# Altium PCB Drimp_Quadcopter.PcbDoc
Units mm, origin at the board's own origin, x right, y up, seen from the top; angles counter-clockwise.
Board outline 98.2 x 98.2 mm, 4 copper layers (Top Layer, Internal Plane 1, Internal Plane 2, Bottom Layer); 73 components, 52 nets, 297 pads, 99 vias.
Unrouted connection lines stored in the file: 1.
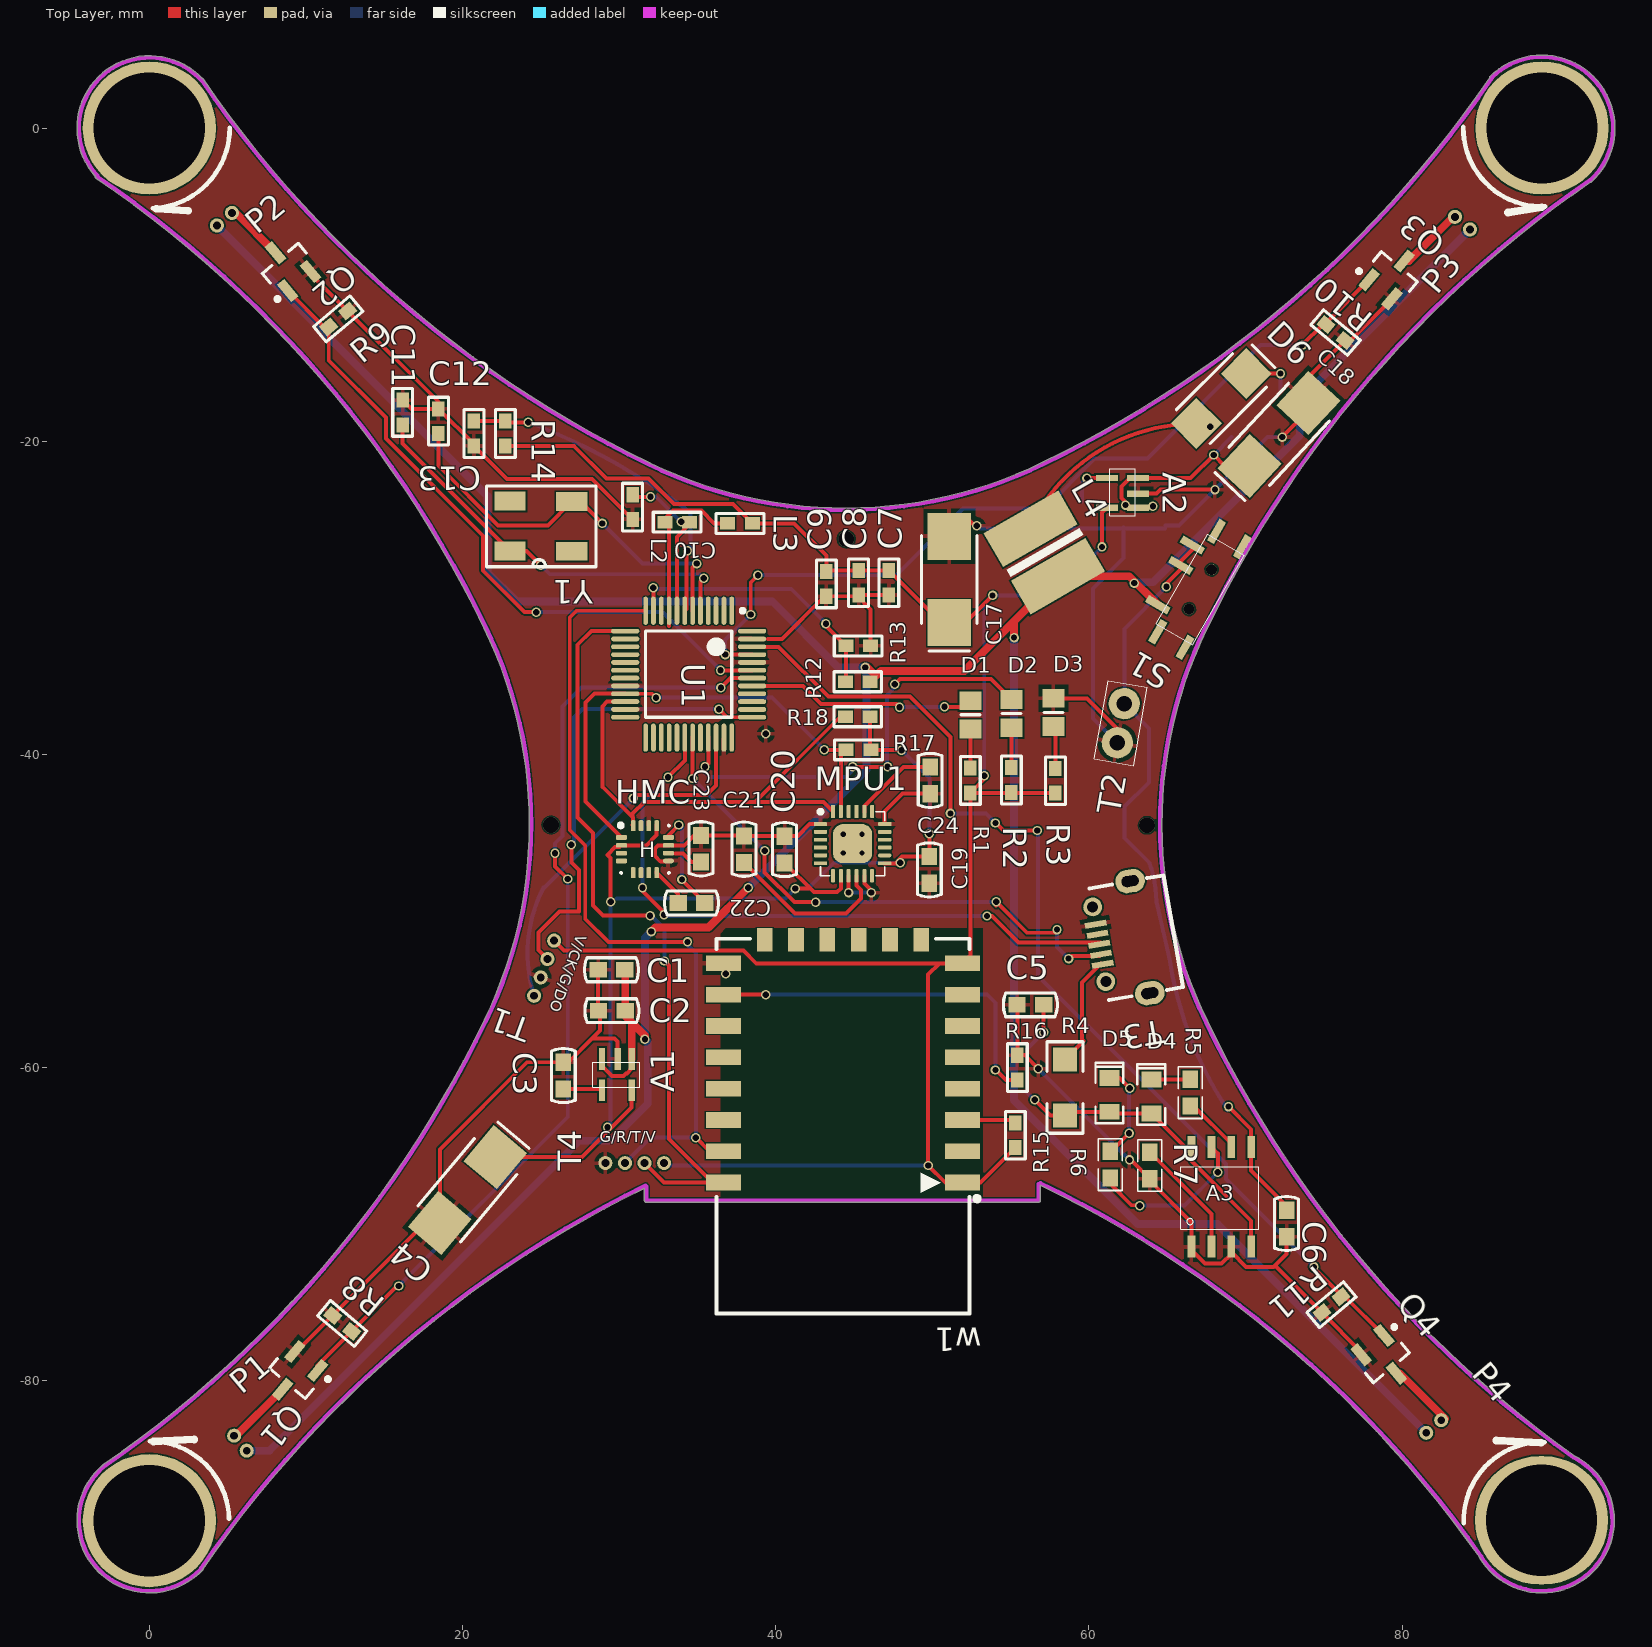
[diagram p0: Top Layer view]
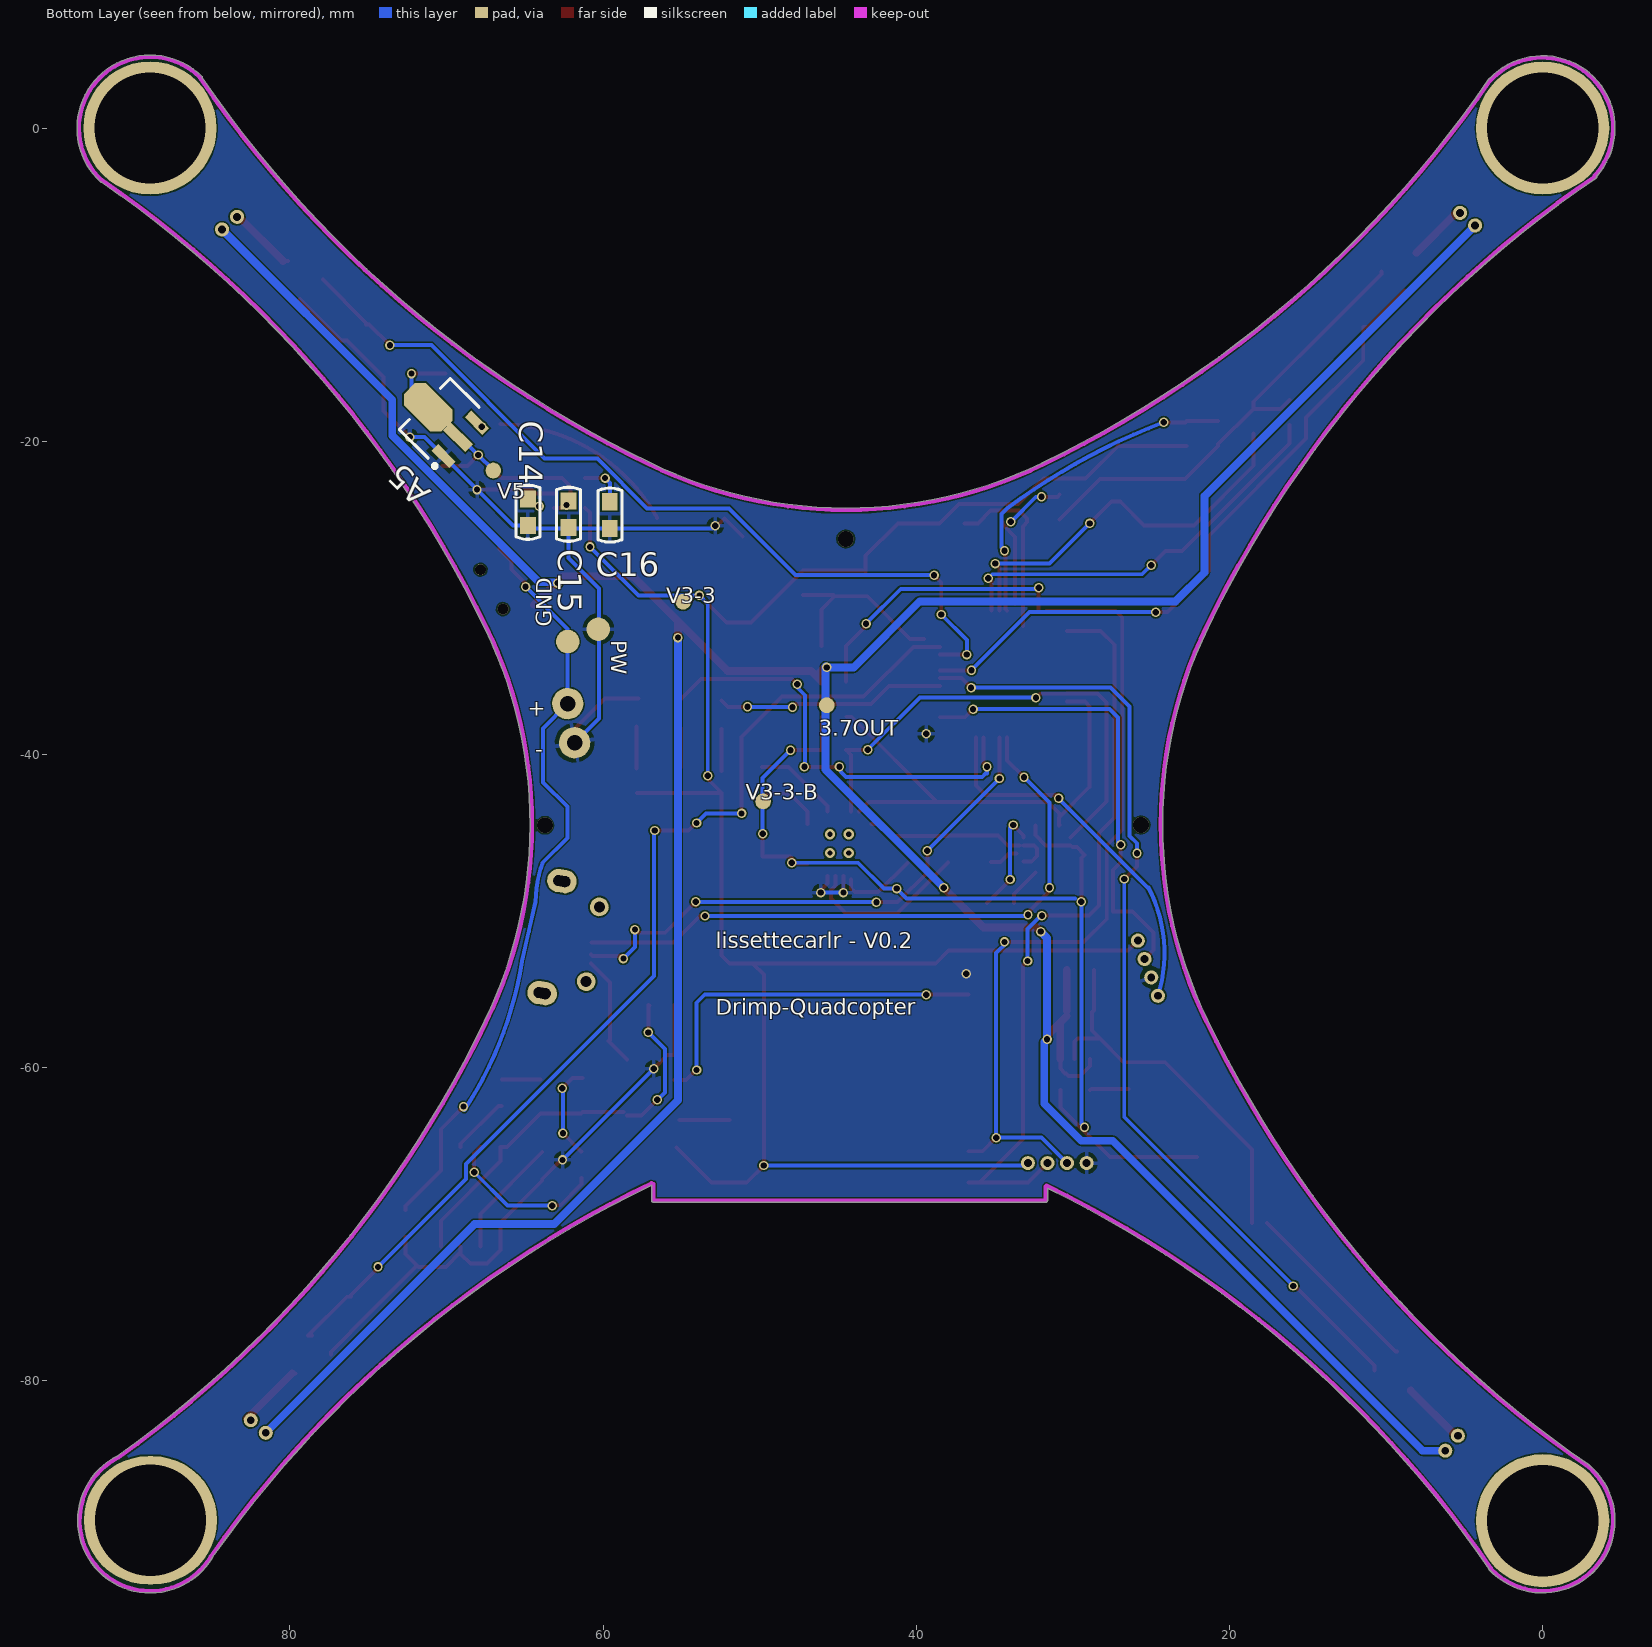
[diagram p1: Bottom Layer view, seen from below]
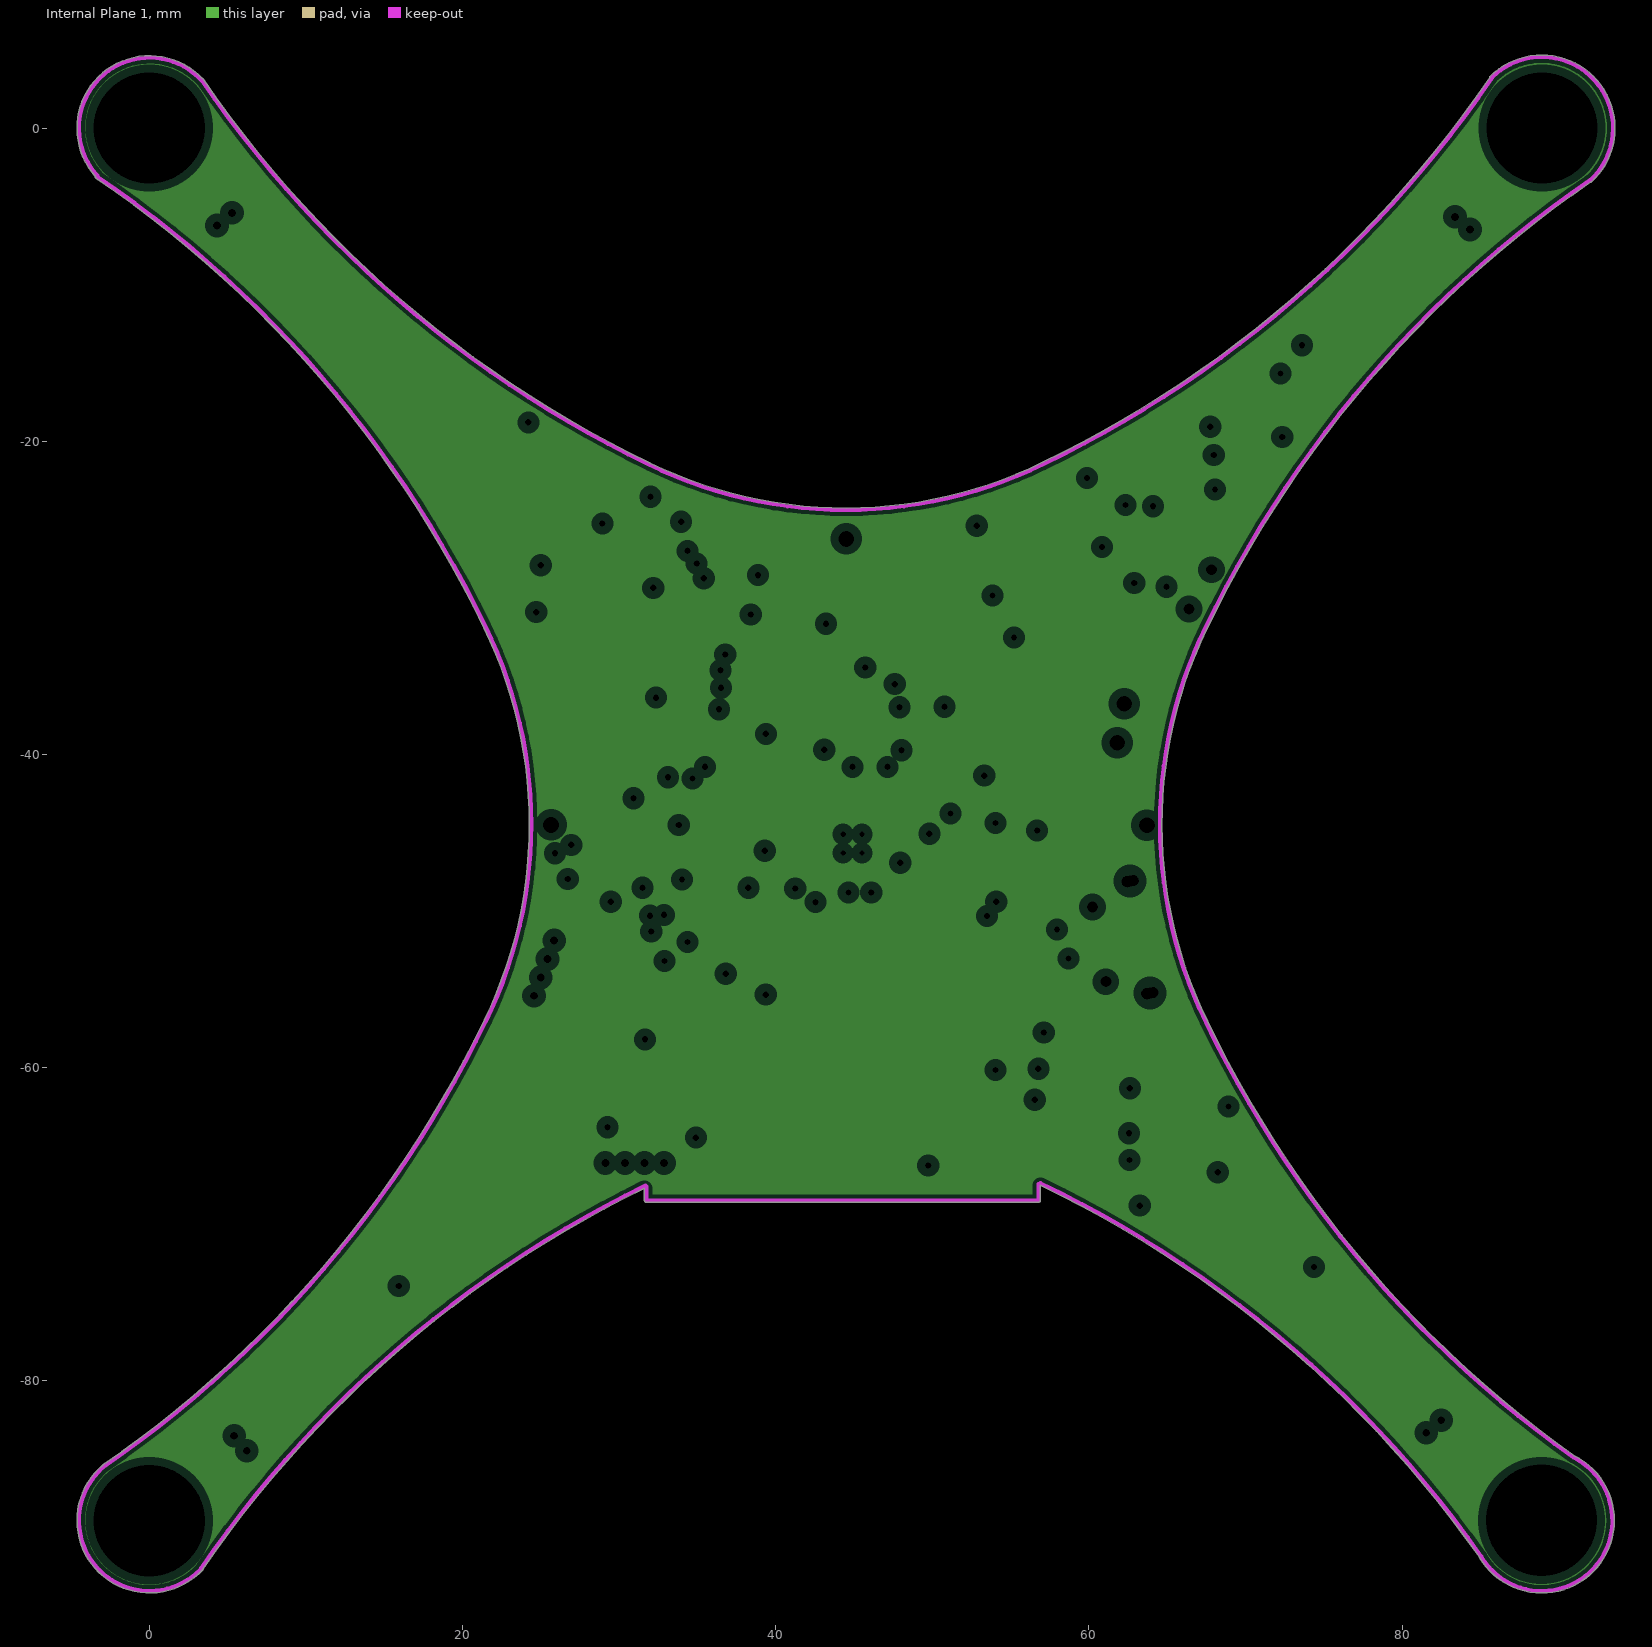
[diagram p2: Internal Plane 1, clearances drawn from the general rule]
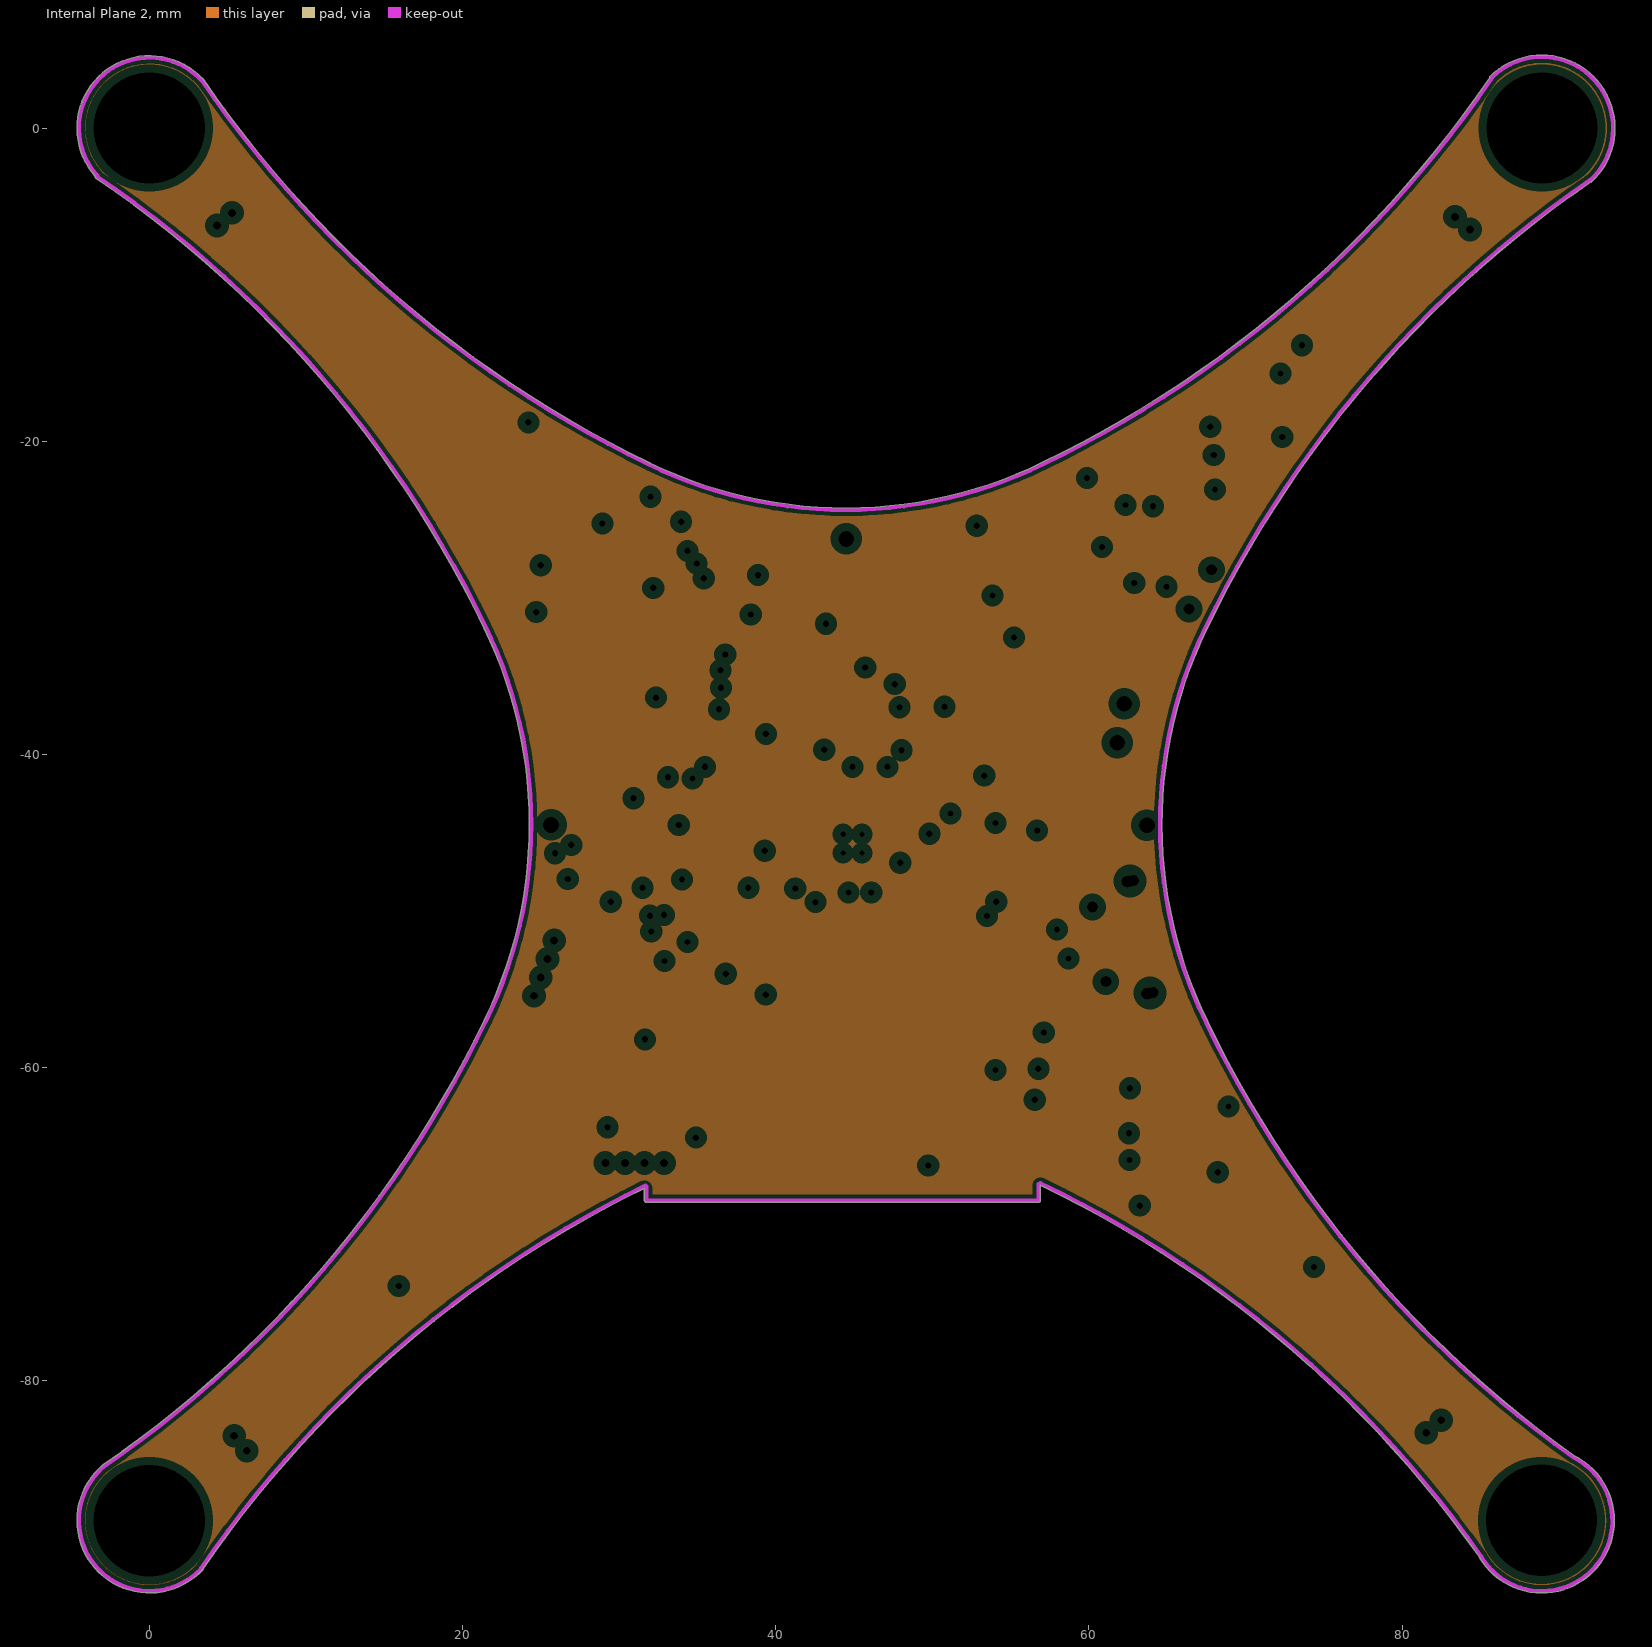
[diagram p3: Internal Plane 2, clearances drawn from the general rule]

## Layer stack, top to bottom
Top Solder: solder mask 0.0102, Solder Resist, Dk 3.5
Top Layer: signal copper 0.0356
Dielectric 1: dielectric 0.32, FR-4, Dk 4.8
Internal Plane 1: plane copper 0.0356
Dielectric2: dielectric 0.32, FR-4, Dk 4.8
Internal Plane 2: plane copper 0.0356
Dielectric3: dielectric 0.32, FR-4, Dk 4.8
Bottom Layer: signal copper 0.0356
Bottom Solder: solder mask 0.0102, Solder Resist, Dk 3.5

## Board outline
-2.974,-85.378 ccw(c0.016,-88.912) 3.416,-92.051 ccw(c3.323,-91.964) 3.45,-91.976 cw(c63.675,-133.386) 31.615,-67.704 31.615,-68.466 ccw(c31.742,-68.466) 31.742,-68.593 56.774,-68.593 ccw(c56.774,-68.466) 56.901,-68.466 56.901,-67.509 cw(c25.193,-133.362) 84.931,-91.25 ccw(c85.056,-91.227) 84.947,-91.293 ccw(c88.916,-88.912) 93.544,-88.912 ccw(c88.916,-88.912) 90.985,-84.772 ccw(c90.928,-84.886) 90.958,-84.762 cw(c133.39,-25.252) 67.576,-57.04 ccw(c67.461,-57.095) 67.576,-57.039 cw(c93.234,-44.462) 67.531,-31.977 ccw(c67.437,-31.891) 67.551,-31.946 cw(c133.366,-63.734) 92,-3.478 ccw(c91.997,-3.35) 92.084,-3.444 ccw(c88.916,-0.012) 93.587,-0.012 ccw(c88.916,-0.012) 85.613,3.291 ccw(c85.703,3.201) 85.576,3.19 cw(c25.256,44.463) 57.044,-21.351 ccw(c57.099,-21.466) 57.043,-21.351 cw(c44.466,4.306) 31.981,-21.396 ccw(c31.895,-21.49) 31.95,-21.376 cw(c63.738,44.438) 3.445,3.125 ccw(c3.34,3.053) 3.37,3.177 ccw(c0.016,-0.012) -3.445,-3.084 ccw(c-3.32,-3.106) -3.392,-3.211 cw(c-44.459,-63.671) 21.355,-31.883 ccw(c21.47,-31.828) 21.355,-31.884 cw(c-4.302,-44.462) 24.272,-44.462 cw(c-4.302,-44.462) 21.4,-56.946 ccw(c21.494,-57.032) 21.38,-56.977 cw(c-44.434,-25.189) -2.942,-85.359 ccw(c-2.892,-85.476)

## Design rules (kind name [scope] priority, off if disabled: settings)
Clearance [All] p1: gap=0.1
PlaneClearance [All] p1: clearance=0.508
PlaneConnect [All] p1: planeconnectstyle=Relief reliefexpansion=0.508 reliefentries=4 reliefconductorwidth=0.254 reliefairgap=0.254
PolygonConnect [All] p1: connectstyle=Relief reliefconductorwidth=0.254 reliefentries=4 polygonreliefangle="90 Angle" airgapwidth=0.254
RoutingVias [All] p1: holewidth=0.711 width=1.27 viastyle="Through Hole" minholewidth=0.711 minwidth=1.27 maxholewidth=0.711 maxwidth=1.27
SolderMaskExpansion [All] p1: expansion=0.102
Width [All] p1: maxlimit=0.6 minlimit=0.1 preferedwidth=0.254
28 further rules are at their usual default settings.

## Components (designator, comment, footprint, x,y, rotation, side; value= is the part's Value field where it differs from the comment)
A1 "mic5219" SOT23-5 28.905,-61.239 r0 top
A2 "mic5219" SOT23-5 61.341,-22.352 r270 top
A3 "TP4056" SOP8 66.548,-71.425 r0 top
A5 "ME2108A" SOT-89_M 70.46,-18.542 r45 bottom
C1 "Cap" C-RAD-0603 29.515,-53.746 r0 top
C2 "Cap" C-RAD-0603 29.54,-56.363 r0 top
C3 "Cap" C-RAD-0603 26.441,-60.503 r270 top
C4 "Cap Pol" CAP-6032 20.32,-67.818 r230 top
C5 "Cap" C-RAD-0603 56.261,-55.982 r0 top
C6 "Cap" C-RAD-0603 72.619,-69.952 r270 top
C7 "Cap" 0603-N-CAP 47.219,-29.032 r90 top
C8 "Cap" 0603-N-CAP 45.288,-29.032 r90 top
C9 "Cap" 0603-N-CAP 43.231,-29.108 r90 top
C10 "Cap" 0603-N-CAP 33.706,-25.171 r180 top
C11 "Cap" 0603-N-CAP 16.18,-18.161 r270 top
C12 "Cap" 0603-N-CAP 18.466,-18.72 r90 top
C13 "Cap" 0603-N-CAP 20.726,-19.507 r90 top
C14 "Cap" C-RAD-0603 64.795,-24.536 r90 bottom
C15 "Cap" C-RAD-0603 62.205,-24.663 r90 bottom
C16 "Cap" C-RAD-0603 59.563,-24.714 r90 bottom
C17 "Cap Pol" CAP-6032 51.079,-28.829 r90 top
C18 "Cap Pol" CAP-6032 72.136,-19.558 r47 top
C19 "Cap" C-RAD-0603 49.809,-47.371 r90 top
C20 "Cap" C-RAD-0603 40.564,-46.076 r270 top
C21 "Cap" C-RAD-0603 37.973,-46.05 r270 top
C22 "Cap" C-RAD-0603 34.62,-49.479 r180 top
C23 "Cap" C-RAD-0603 35.23,-46.025 r270 top
C24 "Cap" C-RAD-0603 49.86,-41.656 r90 top
D1 "D2" 6-0805_N 52.426,-37.465 r90 top
D2 "D2" 6-0805_N 55.067,-37.389 r90 top
D3 "D2" 6-0805_N 57.734,-37.313 r90 top
D4 "LED0" LED0805G 63.983,-62.916 r90 top
D5 "LED0" LED0805R 61.316,-62.814 r90 top
D6 "Diode" DIODE-SMA 68.453,-17.272 r45 top
HMC "Component_1" HMC5883 31.648,-46.05 r0 top
L2 "Inductor" "0603-N - res" 30.861,-24.206 r90 top
L3 "Inductor" "0603-N - res" 37.719,-25.248 r180 top
L4 "Inductor" CD54NP 57.15,-27.102 r300 top
MPU1 "MPU6050" MPU6050 44.907,-45.695 r0 top
P1 "motor1" P2-T-1.25 6.223,-84.455 r130 top
P2 "motor2" P2-T-1.25 4.318,-6.223 r40 top
P3 "motor3" P2-T-1.25 84.328,-6.477 r140 top
P4 "motor4" P2-T-1.25 81.534,-83.312 r40 top
Q1 "SI2302" SOT-23_M 9.271,-79.629 r230 top
Q2 "SI2302" SOT-23_M 8.814,-8.865 r130 top
Q3 "SI2302" SOT-23_M 79.375,-9.398 r50 top
Q4 "SI2302" SOT-23_M 78.867,-78.613 r310 top
R1 "Res1" "0603-N - res" 52.426,-41.656 r270 top
R2 "Res1" "0603-N - res" 55.042,-41.631 r270 top
R3 "Res1" "0603-N - res" 57.861,-41.681 r270 top
R4 "Res1" 1206 58.471,-61.265 r90 top
R5 "Res1" 0603-1 66.472,-61.595 r270 top
R6 "Res1" 0603-1 61.366,-66.192 r270 top
R7 "Res1" 0603-1 63.881,-66.243 r270 top
R8 "Res1" "0603-N - res" 12.319,-76.327 r140 top
R9 "Res1" "0603-N - res" 12.065,-12.192 r40 top
R10 "Res1" "0603-N - res" 75.743,-13.056 r320 top
R11 "Res1" "0603-N - res" 75.489,-75.133 r220 top
R12 "Res1" "0603-N - res" 45.237,-35.357 r180 top
R13 "Res1" "0603-N - res" 45.263,-33.071 r0 top
R14 "Res2" "0603-N - res" 22.733,-19.507 r90 top
R15 "Res2" "0603-N - res" 55.296,-64.313 r90 top
R16 "Res2" "0603-N - res" 55.423,-59.995 r270 top
R17 "Res2" "0603-N - res" 45.288,-39.7 r180 top
R18 "Res2" "0603-N - res" 45.237,-37.592 r180 top
S1 "switch" 拨动开关 69.926,-27.28 r240 top
T1 "SW_download" P4_1.25 25.425,-53.061 r250 top
T2 "P2" P2 62.255,-36.754 r260 top
T3 "mini usb" USB_MICRO_5S_B 60.655,-52.121 r280 top
T4 "P4" P4_1.25 31.623,-66.091 r180 top
U1 "STM32F101C8T6" LQFP48_N 34.442,-34.874 r270 top
w1 "ESP12" ESP_12_F 52.299,-67.335 r180 top
Y1 "8M" 5032_ 27.508,-27 r180 top

## Footprints (in the part's own frame and the unit in brackets; to place one, negate y for a bottom-side part, rotate by r counter-clockwise, add the part's x,y. Pads: shape width x height; smd on the part's side, far side on the other; paste and mask are expansions set on the pad)
6-0805_N [mm] "Chip Resistor, Body 2.0x1.2mm, IPC Medium Density"
  rect 1.2x1.4 smd: 1(-0.9,0) 2(0.9,0)
  silkscreen extent 0,-0.6 0,0.6, body extent -1.07,-0.7 1.07,0.7, height 0.7
0603-1 [mm] "贴片带丝印"
  rect 1.1x1 smd: 1(-0.85,0) 2(0.85,0)
  silkscreen extent -1.65,-0.76 1.65,0.76, body extent -1.14,-0.38 1.14,0.38, height 1
"0603-N - res" [mm]
  rect 0.96x0.8 smd: 1(-0.79,0) 2(0.79,0)
  silkscreen extent -1.52,-0.64 1.52,0.64, body extent -0.8,-0.4 0.8,0.4, height 0.4
0603-N-CAP [mm]
  rect 0.96x0.8 smd: 1(-0.79,0) 2(0.79,0)
  silkscreen extent -1.52,-0.64 1.52,0.64, body extent -0.8,-0.4 0.8,0.4, height 0.3
1206 [mil] "贴片元件"
  rect 60x60 smd: 1(-70,0) 2(70,0)
  silkscreen extent -115,-45 115,45, body extent -75,-35 75,35, height 39
5032_ [mm]
  rect 2x1.2 smd: 1(0.533,-3.15) 2(4.47,-3.175) 3(4.47,0) 4(0.533,0.025)
  silkscreen extent -1.02,-4.14 5.97,1.02, body extent -0.03,-3.15 5,0.05, height 0.8
C-RAD-0603 [mm] "贴片电容"
  rect 1.1x1 smd: 1(-0.85,0) 2(0.85,0)
  silkscreen extent -1.73,-0.76 1.73,0.76, body extent -1.14,-0.38 1.14,0.38, height 1
CAP-6032 [mm] "钽电容"
  rect 3x2.8 smd: 1(-2.75,0) 2(2.75,0)
  silkscreen extent -4.57,-1.78 2.81,1.78, body extent -3.18,-1.65 3.18,1.65, height 1.3
CD54NP [mm]
  rect 2.5x5.5 smd mask+0: 1(-1.752,-0.001) 2(1.748,-0.001)
  silkscreen extent -0.25,-2.64 0.28,2.72, body extent -2.89,-2.6 2.87,2.6, height 4.5
DIODE-SMA [mm] "贴片二极管"
  rect 2.3x2.3 smd: 1(-2.25,0) 2(2.25,0)
  silkscreen extent -2.54,-1.52 3.81,1.52, body extent -2.92,-1.4 2.92,1.4, height 3
ESP_12_F [mm] "ESP-12 Wi-Fi Module by AI-Thinker"
  rect 2.25x1 smd: 1(0.375,0) 2(0.375,-2) 3(0.375,-4) 4(0.375,-6) 5(0.375,-8) 6(0.375,-10) 7(0.375,-12) 8(0.375,-14) 15(15.625,-14) 16(15.625,-12) 17(15.625,-10) 18(15.625,-8) 19(15.625,-6) 20(15.625,-4) 21(15.625,-2) 22(15.625,0)
  rect 1x1.5 smd: 9(3,-15.5) 10(5,-15.5) 11(7,-15.5) 12(9,-15.5) 13(11,-15.5) 14(13,-15.5)
  silkscreen extent -0.7,-15.57 16.08,8.37, body extent 0,-15.58 16,8.42, height 2.25
HMC5883 [mm] "QFN, 16-Leads, Body 3.0x3.0mm (max), Pitch 0.50mm, IPC Medium Density"
  rrect50% 0.7x0.3 smd: 1(-1.5,0.75) 2(-1.5,0.25) 3(-1.5,-0.25) 4(-1.5,-0.75) 10(1.5,-0.25) 11(1.5,0.25) 12(1.5,0.75)
  rrect50% 0.3x0.7 smd: 5(-0.75,-1.5) 6(-0.25,-1.5) 7(0.25,-1.5) 8(0.75,-1.5) 13(0.75,1.5) 14(0.25,1.5) 15(-0.25,1.5) 16(-0.75,1.5)
  oval 0.7x0.3 smd: 9(1.5,-0.75)
  silkscreen extent -1.67,-1.55 1.55,1.65
LED0805G [mil]
  rect 40x50 smd: 1(0,0) 2(85,0)
  silkscreen extent -29,-35 123,35, body extent 3,-24 83,25, height 43
LED0805R [mil]
  rect 40x50 smd: 1(0,0) 2(85,0)
  silkscreen extent -29,-35 123,35, body extent 3,-24 83,25, height 43
LQFP48_N [mm] "Thin QFP, 48-Leads, Body 7x7mm, Pitch 0.5mm, IPC Medium Density"
  oval 1.8x0.3 smd: 1(-4.05,2.75) 2(-4.05,2.25) 3(-4.05,1.75) 4(-4.05,1.25) 5(-4.05,0.75) 6(-4.05,0.25) 7(-4.05,-0.25) 8(-4.05,-0.75) 9(-4.05,-1.25) 10(-4.05,-1.75) 11(-4.05,-2.25) 12(-4.05,-2.75) 25(4.05,-2.75) 26(4.05,-2.25) 27(4.05,-1.75) 28(4.05,-1.25) 29(4.05,-0.75) 30(4.05,-0.25) 31(4.05,0.25) 32(4.05,0.75) 33(4.05,1.25) 34(4.05,1.75) 35(4.05,2.25) 36(4.05,2.75)
  oval 0.3x1.8 smd: 13(-2.75,-4.05) 14(-2.25,-4.05) 15(-1.75,-4.05) 16(-1.25,-4.05) 17(-0.75,-4.05) 18(-0.25,-4.05) 19(0.25,-4.05) 20(0.75,-4.05) 21(1.25,-4.05) 22(1.75,-4.05) 23(2.25,-4.05) 24(2.75,-4.05) 37(2.75,4.05) 38(2.25,4.05) 39(1.75,4.05) 40(1.25,4.05) 41(0.75,4.05) 42(0.25,4.05) 43(-0.25,4.05) 44(-0.75,4.05) 45(-1.25,4.05) 46(-1.75,4.05) 47(-2.25,4.05) 48(-2.75,4.05)
  silkscreen extent -4.17,-2.75 2.75,3.58, body extent -3.5,-3.5 3.5,3.5, height 1.6
MPU6050 [mm] "QFN, 24-Leads, Body 4.1x4.1mm (max), Pitch 0.50mm, IPC Medium Density"
  rrect50% 0.85x0.25 smd: 1(-2.05,1.25) 2(-2.05,0.75) 3(-2.05,0.25) 4(-2.05,-0.25) 5(-2.05,-0.75) 6(-2.05,-1.25) 13(2.05,-1.25) 15(2.05,-0.25) 16(2.05,0.25) 17(2.05,0.75) 18(2.05,1.25)
  rrect50% 0.25x0.85 smd: 7(-1.25,-2.05) 8(-0.75,-2.05) 9(-0.25,-2.05) 10(0.25,-2.05) 11(0.75,-2.05) 12(1.25,-2.05) 19(1.25,2.05) 20(0.75,2.05) 21(0.25,2.05) 22(-0.25,2.05) 23(-0.75,2.05) 24(-1.25,2.05)
  oval 0.85x0.25 smd: 14(2.05,-0.75)
  rrect50% 2.5x2.5 smd: 25(0,0)
  silkscreen extent -2.18,-2.05 2.05,2.16
P2 [mm]
  round 2 hole 1: 1(0,0) 2(2.54,0)
  silkscreen extent -1.27,-1.27 3.81,1.27
P2-T-1.25 [mm]
  round 0.9 hole 0.5: 1(0,0) 2(1.25,0)
P4_1.25 [mm]
  round 0.9 hole 0.5: 1(-1.25,0) 2(0,0) 3(1.25,0) 4(2.5,0)
SOP8 [mm]
  rect 0.5x1.4 smd: 1(0,0) 2(1.27,0) 3(2.54,0) 4(3.81,0) 5(3.81,6.35) 6(2.54,6.35) 7(1.27,6.35) 8(0,6.35)
  silkscreen extent -0.7,1.1 4.3,5.1, body extent -0.61,0.16 4.41,6.2, height 1.6
SOT23-5 [mm]
  rect 0.4x1.4 smd: 1(1.9,1.8) 2(1,1.8) 3(0,1.8) 4(0,-0.2) 5(1.9,-0.2)
  silkscreen extent -0.6,0 2.4,1.6, body extent -0.45,-0.6 2.45,2.2, height 1.2
SOT-23_M [mm] "SOT23, 3-Leads, Body 2.9x1.3mm, Pitch 0.95mm, Lead Span 2.3mm, IPC Low Density"
  rect 1.45x0.6 smd: 1(-1.175,0.95) 2(-1.175,-0.95) 3(1.175,0)
  silkscreen extent -1.3,-1.5 0.7,1.92, body extent -0.7,-1.5 0.7,1.5, height 1.11
SOT-89_M [mm] "SOT89, 3-Leads, Body 4.6x2.6 mm, Pitch 1.5mm, Lead Span 4.1mm, IPC Low Density"
  rect 1.6x0.6 smd: 1(-1.9,1.5) 3(-1.9,-1.5)
  rect 2x0.7 smd: 2(-1.7,0)
  oct 3.4x2 smd: 2(1,0)
  silkscreen extent -2.07,-2.3 1.3,2.47, body extent -1.3,-2.3 1.3,2.3, height 1.7
USB_MICRO_5S_B [mil] "USB Micro SMT 5S B"
  rect 15x54 smd: 1(51,0) 2(25.5,0) 3(0,0) 4(-25.5,0) 5(-51,0)
  oval 59.06x74.8 hole 27.56 slot 43.31 at 90 deg: 6(-143,104) 7(143,104)
  round 47.24 hole 27.5: 8(95.5,0) 9(-95.5,0)
  silkscreen extent -143,0 143,189, body extent -161,-9 161,204, height 105
拨动开关 [mm] "MK12C02"
  rect 1.6x0.5 smd: 0(-0.425,-2.3) 0(-0.4,-0.375) 0(7,-0.35) 0(7,-2.35)
  round 0.7 hole 0.7: 0(1.85,-1.35) 0(4.75,-1.35)
  rect 0.5x1.6 smd: 1(1.1,-3.2) 1(2.6,-3.2) 2(5.5,-3.2)
  silkscreen extent 0,-2.7 6.6,0

## Part data
A1 A2: "低压差转3.3V"
A5: library part bl8530
C1 C2 C3 C5 C6 C14 C15 C16 C19 C20 C21 C22 C23 C24: "无极性电容"
C4 C17 C18: "极性电解电容"
C7 C8 C9 C10 C11 C12 C13: "Capacitor"
D1 D2 D3: library part LED3, "Typical BLUE SiC LED"
D4 D5: "发光二极管"
D6: "二极管"
L4: "电感"
P1 P2 P3 P4: library part motor, "电机连接口"
Q1 Q2 Q3 Q4: library part IRLML2402, "HEXFET Power MOSFET"
R1 R2 R3 R8 R9 R10 R11 R12 R13 R14 R15 R16 R17 R18: "Resistor"
R4 R5 R6 R7: "贴片电阻"
U1: "STM32 ARM-based 32-bit MCU with 64 Kbytes Flash, 48-pin LQFP, Industrial Temperature"
Y1: library part XTAL, "Crystal Oscillator"

## Free pads (board coordinates)
  round 8.5 hole 7.1: 1(0,-88.925) 2(0,0) 3(88.925,0)
  oval 8.5x8.2 hole 7.1: 4(88.9,-88.9)
  round 1 smd far side: 5(45.72,-36.855) 5(49.784,-43.002) 5(54.889,-30.251) 5(67.005,-21.869)
  round 1.5 smd far side: 5(60.3,-32.004) 5(62.255,-32.791)

## Via types
v1: diameter 0.6, hole 0.4, Top Layer to Bottom Layer, 92 vias
v2: diameter 0.66, hole 0.33, Top Layer to Bottom Layer, tented top, 4 vias
v3: diameter 1, hole 1, Top Layer to Bottom Layer, 3 vias

## Nets (pads, with @x,y where several pads share a name; then routed paths per layer and width w, separated by ;. In a path a pad name is that pad's centre, name@x,y a point inside that pad or via, vN(x,y) a via of type N, cw(c..) or ccw(c..) an arc to the next point about the centre after c; other vN are vias at no path point)
3.7VOUT: A1.1 A1.3 C1.2 C2.2 L4.2 P1.1 P2.1 P3.1 P4.1 pad.5@45.72,-36.855 R12.1 S1.2 | length 258.3
  Top Layer w0.254: A1.3 28.905,-59.878 29.547,-60.52 30.285,-60.52 30.447,-60.358 30.497,-60.358 30.805,-60.051 A1.1 ; C2.2@30.39,-56.705 C2.2 ; v1(31.648,-58.191) v1@31.648,-57.963 ; v1(45.72,-34.442) v1@45.847,-34.442 ; R12.1 46.38,-35.004 R12.1@46.38,-34.976 ; L4.2@58.024,-28.692 L4.2
  Top Layer w0.5: C2.2@30.39,-56.705 30.805,-57.12 ; C2.2 C1.2@30.39,-53.772 ; A1.1 30.805,-57.12 ; v1@31.648,-57.963 30.805,-57.12 ; v1(32.055,-51.308) 32.309,-51.054 35.712,-51.054 v1(38.252,-48.514) ; v1@45.847,-34.442 R12.1@46.38,-34.976 ; R12.1 46.713,-34.671 52.045,-34.671 55.22,-31.496 ; v1(55.22,-32.537) 55.22,-31.496 ; L4.2@58.024,-28.692 55.22,-31.496 ; L4.2 62.578,-28.616 S1.2
  Bottom Layer w0.254: v1(31.648,-58.191) v1@31.826,-58.369
  Bottom Layer w0.5: P2.1 21.59,-23.495 21.59,-28.372 23.444,-30.226 39.776,-30.226 43.993,-34.442 v1(45.72,-34.442) 45.745,-34.442 45.796,-34.392 45.796,-40.97 v1(38.252,-48.514) ; P1.1 7.671,-84.455 27.457,-64.668 29.464,-64.668 31.826,-62.306 v1@31.826,-58.369 ; v1(31.648,-58.191) 31.648,-51.714 v1(32.055,-51.308) ; v1(55.22,-32.537) 55.22,-62.078 63.119,-69.977 68.199,-69.977 P4.1 ; v1@63.144,-29.007 64.084,-29.007 73.457,-19.634 73.457,-17.348 P3.1
  other v1: 62.89,-29.058
BUZZER: U1.15
G0: w1.18
GND: A1.2 A2.2 A3.1 A3.3 A5.1 C1.1 C2.1 C3.1 C4.2 C5.1 C6.2 C7.1 C8.1 C9.1 C11.1 C12.2 C13.1 C14.1 C15.1 C16.1 C17.2 C18.2 C19.1 C20.1 C21.1 C23.1 C24.1 D3.2 HMC.9 HMC.11 HMC.14 L2.1 MPU1.1 MPU1.9 MPU1.11 MPU1.18 pad.5@60.3,-32.004 Q1.2 Q2.2 Q3.2 Q4.2 R7.2 R8.2 R9.2 R10.2 R11.2 R13.2 R16.1 T1.3 T2.2 T3.5 T4.4 U1.20 U1.23 U1.35 U1.44 U1.47 w1.15 | length 198.7
  Top Layer w0.254: Q1.2 9.415,-78.118 R8.2 C4.2@17.608,-69.925 ; Q2.2 10.297,-9.311 R9.2 18.466,-17.48 C12.2 ; C11.1 16.739,-17.93 C12.2 ; C4.2 18.552,-65.217 24.116,-59.653 C3.1 26.758,-59.653 28.27,-58.141 ; C2.1@28.665,-56.337 C1.1 ; C2.1 28.778,-56.451 28.778,-57.633 28.27,-58.141 ; A1.2 29.905,-58.328 29.718,-58.141 28.27,-58.141 ; L2.1 28.268,-22.403 22.832,-22.403 C13.1 20.726,-20.19 C12.2 ; HMC.9@33.148,-46.831 32.674,-46.831 32.662,-46.819 32.621,-46.819 32.283,-46.482 32.283,-45.999 32.483,-45.8 HMC.11 ; HMC.11@33.401,-45.8 34.159,-45.8 34.784,-45.175 C23.1 37.948,-45.175 C21.1 41.409,-45.2 42.17,-44.439 MPU1.1@42.857,-44.439 ; 39.493,-32.624 40.401,-32.624 43.127,-29.898 C9.1 C8.1@45.212,-29.898 ; v1@44.657,-48.815 MPU1.9 ; MPU1.11 45.657,-48.248 46.101,-48.692 v1(46.101,-48.819) ; R13.2 46.053,-30.739 C8.1@45.212,-29.898 ; MPU1.18 46.957,-43.645 48.096,-42.506 C24.1 ; C7.1 C8.1 C8.1@45.212,-29.898 ; C17.2 52.241,-24.917 52.724,-25.4 v1(52.832,-25.4) ; C5.1@55.423,-55.993 R16.1 55.903,-59.205 v1(56.769,-60.071) ; D3.2 59.861,-36.413 61.814,-38.366 T2.2 ; v1@62.802,-66.015 R7.2 63.881,-67.208 66.548,-69.875 A3.1 66.548,-71.644 67.41,-72.506 68.464,-72.506 69.088,-71.882 A3.3@69.088,-71.78 ; A2.2 64.303,-23.352 64.567,-23.089 v1(68.047,-23.089) ; A3.3 A3.3@69.088,-71.78 ; 71.78,-72.72 70.028,-72.72 A3.3@69.088,-71.78 ; 71.872,-72.629 72.619,-71.882 C6.2 ; 71.963,-72.72 R11.2 77.384,-78.141 Q4.2 ; v1(72.339,-19.736) 74.011,-18.064 C18.2 74.011,-15.9 R10.2 76.693,-13.563 Q3.2
  Bottom Layer w0.254: v1(44.653,-48.819) v1(46.101,-48.819) ; v1(52.832,-25.4) 52.996,-25.564 C16.1 C15.1@62.205,-25.564 ; v1(56.769,-60.071) v1(62.586,-65.888) ; T2.2 60.249,-37.69 60.249,-29.413 62.205,-27.457 C15.1@62.205,-25.564 ; C15.1 C15.1@62.205,-25.564 ; C14.1@64.872,-25.564 C15.1@62.205,-25.564 ; C14.1@64.872,-25.386 65.749,-25.386 v1(68.047,-23.089) 71.399,-19.736 v1(72.339,-19.736)
  other v1: 36.805,-54 39.37,-38.684
IIC2_SCL: HMC.1 MPU1.23 R17.2 U1.21 | length 32
  Top Layer w0.254: HMC.1 27.864,-43.016 27.864,-36.678 28.425,-36.116 U1.21@30.392,-36.116 ; U1.21 32.111,-36.124 v1(32.36,-36.373) ; v1(43.104,-39.7) R17.2 44.157,-40.041 MPU1.23
  Bottom Layer w0.254: v1(32.36,-36.373) 39.776,-36.373 v1(43.104,-39.7)
IIC2_SDA: HMC.16 MPU1.24 R18.2 U1.22 | length 31.7
  Top Layer w0.254: U1.22 29.238,-36.624 28.931,-36.932 28.931,-42.062 30.867,-43.999 ; HMC.16@30.867,-44.519 HMC.16 30.898,-44.03 30.867,-43.999 ; 38.671,-43.04 44.12,-37.592 R18.2 ; MPU1.24 43.053,-43.04 31.61,-43.04 30.867,-43.783 30.867,-43.999
LED_GRE: D2.2 U1.33 | length 27.6
  Top Layer w0.254: v1(35.484,-40.792) 35.692,-40.584 U1.33 ; v1(44.907,-40.792) v1(47.142,-40.792) ; v1(47.6,-35.509) 47.93,-35.179 53.757,-35.179 D2.2
  Bottom Layer w0.254: 35.484,-41.224 v1(35.484,-40.792) ; 35.585,-41.224 35.789,-41.427 44.501,-41.427 44.806,-41.123 ; v1@47.092,-40.716 47.092,-36.22 47.6,-35.712 v1(47.6,-35.509)
LED_RED: D1.2 U1.41 | length 14.7
  Top Layer w0.254: U1.41 41.746,-35.624 42.901,-36.779 47.701,-36.779 v1(47.904,-36.982) ; v1(50.775,-36.957) 52.034,-36.957 D1.2
  Bottom Layer w0.254: v1(47.904,-36.982) 50.749,-36.982 v1(50.775,-36.957)
NetA1_4: A1.4 C3.2 | length 2.5
  Top Layer w0.254: C3.2 28.819,-61.353 A1.4
NetA2_4: A2.4 C16.2 | length 2.9
  Top Layer w0.254: v1(59.868,-22.352) A2.4
  Bottom Layer w0.254: C16.2 59.563,-22.657 v1(59.868,-22.352)
NetA3_2: A3.2 R7.1 | length 7.7
  Top Layer w0.254: R7.1 67.818,-69.33 A3.2
NetA3_4: A3.4 A3.8 C5.2 D4.1 D5.1 R4.1 | length 25.8
  Top Layer w0.254: v1(56.54,-62.052) 57.531,-63.043 R4.1 ; C5.2@57.048,-56.044 C5.2 v1(57.111,-57.748) ; R4.1@58.699,-62.814 D5.1 61.417,-62.916 D4.1 66.142,-65.075 A3.8 66.548,-65.964 70.358,-69.774 A3.4
  Bottom Layer w0.254: v1(56.54,-62.052) 56.058,-61.57 56.058,-58.801 v1(57.111,-57.748)
NetA3_6: A3.6 R5.2 | length 3.8
  Top Layer w0.254: R5.2 66.677,-62.445 69.088,-64.856 A3.6
NetA3_7: A3.7 R6.2 | length 10.2
  Top Layer w0.254: R6.2 61.366,-67.437 62.713,-68.783 v1@63.017,-68.783 ; A3.7 68.224,-65.481 v1(68.224,-66.675)
  Bottom Layer w0.254: v1(63.246,-68.809) 66.091,-68.809 v1(68.224,-66.675)
NetA5_3: A5.3 D6.1 L4.1 | length 12.2
  Top Layer w0.254: L4.1@56.543,-24.906 cw(c66.733,-30.54) D6.1@66.548,-18.898
  other v1: 67.742,-19.075
NetC11_2: C11.2 U1.5 Y1.3 | length 26.1
  Top Layer w0.254: C11.2 16.18,-20.142 Y1.3 24.079,-27 v1(24.994,-27.915) ; U1.5 35.192,-28.968 v1(35.408,-28.753)
  Bottom Layer w0.254: v1(24.994,-27.915) 25.573,-28.494 35.149,-28.494 v1(35.408,-28.753)
NetC12_1: C12.1 U1.6 Y1.1 | length 25.5
  Top Layer w0.254: C12.1 18.466,-21.565 22.276,-25.375 25.451,-25.375 Y1.1 27.534,-23.851 v1(28.931,-25.248) ; U1.6 34.692,-28.071 v1(34.95,-27.813)
  Bottom Layer w0.254: v1(28.931,-25.248) 31.496,-27.813 v1(34.95,-27.813)
NetC13_2: C13.2 R14.2 U1.7 | length 21.7
  Top Layer w0.254: C13.2 R14.2 ; R14.2@22.812,-18.796 v1(24.206,-18.796) ; U1.7 34.315,-30.701 34.315,-27.051 v1(34.366,-27)
  Bottom Layer w0.254: v1(24.206,-18.796) cw(c9.735,-56.968) 34.192,-24.282 34.569,-24.659 34.569,-26.797 v1(34.366,-27)
NetC21_2: C21.2 MPU1.10 | length 10.8
  Top Layer w0.254: C21.2 41.238,-50.165 44.475,-50.165 45.441,-49.2 45.441,-48.641 45.157,-48.358 MPU1.10
NetC22_1: C22.1 HMC.12 | length 6.7
  Top Layer w0.254: HMC.12 33.148,-45.16 v1(33.807,-44.501) ; v1(34.011,-47.981) 34.011,-48.02 C22.1
  Bottom Layer w0.254: v1(33.807,-44.501) 34.011,-44.704 v1(34.011,-47.981)
NetC22_2: C22.2 HMC.8 | length 2.5
  Top Layer w0.254: HMC.8 33.77,-48.922 C22.2
NetC23_2: C23.2 HMC.10 | length 1.9
  Top Layer w0.254: 33.595,-46.322 34.079,-46.322 34.632,-46.875 C23.2
NetC24_2: C24.2 MPU1.20 | length 5.6
  Top Layer w0.254: MPU1.20 45.657,-43.294 48.145,-40.806 C24.2
NetD1_1: D1.1 R1.1 | length 2.7
  Top Layer w0.254: R1.1@52.426,-41.044 D1.1
NetD2_1: D2.1 R2.1 | length 2.5
  Top Layer w0.254: R2.1 D2.1@55.042,-38.314
NetD3_1: D3.1 R3.1 | length 2.7
  Top Layer w0.254: R3.1 D3.1@57.861,-38.213
NetD4_2: D4.2 R5.1 | length 2.5
  Top Layer w0.254: D4.2 R5.1@66.46,-60.757
NetD5_2: D5.2 R6.1 | length 6.1
  Top Layer w0.254: D5.2 61.951,-60.655 v1(62.611,-61.316) ; R6.1 61.404,-65.342 v1(62.56,-64.186)
  Bottom Layer w0.254: v1(62.56,-64.186) 62.56,-61.366 v1(62.611,-61.316)
NetP1_2: P1.2 Q1.3 | length 4.2
  Top Layer w0.254: Q1.3@8.425,-80.62 Q1.3
  Top Layer w0.5: P1.2@5.563,-83.482 Q1.3@8.425,-80.62
NetP2_2: P2.2 Q2.3 | length 3.8
  Top Layer w0.254: P2.2 P2.2@5.514,-5.42
  Top Layer w0.5: P2.2@5.514,-5.42 Q2.3
NetP3_2: P3.2 Q3.3 | length 4.3
  Top Layer w0.254: Q3.3 Q3.3@80.428,-8.498
  Top Layer w0.5: Q3.3@80.428,-8.498 P3.2@83.232,-5.694
NetP4_2: P4.2 Q4.3 | length 4.3
  Top Layer w0.254: Q4.3 Q4.3@79.843,-79.513
  Top Layer w0.5: Q4.3@79.843,-79.513 P4.2@82.745,-82.414
NetR15_2: R15.2 w1.3 | length 3.2
  Top Layer w0.254: w1.3 R15.2@55.108,-63.335
NetR16_2: R16.2 w1.16 | length 23.5
  Top Layer w0.254: w1.16 v1(39.359,-55.335) ; v1(54.026,-60.147) 54.077,-60.147 54.714,-60.785 R16.2
  Bottom Layer w0.254: v1(39.359,-55.335) 53.507,-55.335 54.026,-55.855 v1(54.026,-60.147)
POWER+: A3.5 C6.1 pad.5@62.255,-32.791 S1.1 T2.1 | length 49
  Top Layer w0.254: v1(64.948,-29.286) 64.948,-29.083 65.855,-28.176 65.855,-27.668 66.605,-26.918 S1.1@66.605,-26.632 ; v1(68.91,-62.484) 70.358,-63.932 A3.5 70.358,-66.573 72.619,-68.834 C6.1
  Bottom Layer w0.254: 63.856,-46.976 63.856,-46.914 ; v1(64.948,-29.286) 62.255,-31.979 T2.1 63.83,-38.329 63.83,-41.783 62.281,-43.332 62.281,-45.339 63.856,-46.914 ; v1@68.86,-62.713 cw(c88.952,-49.469) 65.176,-53.188 ccw(c-4092.079,-1002.847) 64.308,-49.396 ccw(c57.057,-49.436) 63.856,-46.914
PWR: R12.2 R13.1 U1.11 | length 17.6
  Top Layer w0.254: v1(32.182,-29.362) 32.192,-29.373 U1.11 ; v1(43.205,-31.648) 43.205,-31.803 R13.1 R12.2@44.473,-35.331
  Bottom Layer w0.254: v1(32.182,-29.362) 32.253,-29.434 40.991,-29.434 v1(43.205,-31.648)
RX: T3.2 U1.31 | length 35.1
  Top Layer w0.254: v1@34.569,-41.656 v1(34.692,-41.533) U1.31 ; v1(39.294,-46.152) 39.294,-47.523 41.199,-49.428 v1(42.545,-49.428) ; v1@54.077,-49.657 v1(54.077,-49.403) 56.058,-51.384 v1@57.861,-51.384 ; v1(58.699,-53.035) 58.872,-52.863 60.664,-52.863 T3.2
  Bottom Layer w0.254: v1(34.692,-41.533) 39.192,-46.033 v1@39.192,-46.05 ; v1(42.545,-49.428) v1@54.127,-49.428 ; v1(57.963,-51.181) 57.963,-52.299 v1@58.547,-52.883
RX2: T4.2 U1.13 w1.22 | length 48.4
  Top Layer w0.254: U1.13 28.226,-32.124 27.356,-32.995 27.356,-42.734 27.337,-42.753 27.337,-44.025 28.321,-45.009 28.321,-49.632 28.981,-50.292 v1(31.979,-50.292) ; T4.2 32.868,-67.335 w1.22@35.966,-67.335 ; v1(32.893,-53.188) 33.172,-53.467 33.172,-64.541 w1.22@35.966,-67.335 ; w1.22 w1.22@35.966,-67.335
  Bottom Layer w0.254: v1@32.207,-50.444 32.893,-51.13 v1(32.893,-53.188)
SWCLK: T1.2 U1.37 | length 29.5
  Top Layer w0.254: T1.2 24.841,-52.476 24.841,-51.359 26.187,-50.013 27.432,-50.013 27.432,-47.371 26.949,-46.888 v1(26.949,-45.771) ; v1(36.373,-37.109) 36.888,-37.624 U1.37
  Bottom Layer w0.254: v1(26.949,-45.771) 27.127,-45.593 27.127,-37.643 27.661,-37.109 v1(36.373,-37.109)
SWDIO: T1.4 U1.34 | length 23.7
  Top Layer w0.254: v1@30.988,-42.596 35.585,-42.596 36.192,-41.989 U1.34
  Bottom Layer w0.254: T1.4 cw(c33.23,-52.684) 25.173,-48.501 ; 25.192,-48.519 v1(30.912,-42.799)
T4PWM1: Q1.1 R8.1 U1.42 | length 62.5
  Top Layer w0.254: Q1.1 10.754,-79.005 R8.1 15.82,-73.939 v1(15.926,-73.939) ; v1(25.908,-46.304) 25.908,-47.142 v1(26.721,-47.955) ; v1(36.5,-35.738) 37.113,-35.124 U1.42
  Bottom Layer w0.254: v1(15.926,-73.939) 26.721,-63.144 v1(26.721,-47.955) ; v1(25.908,-46.304) 25.908,-45.669 26.381,-45.196 26.381,-36.941 27.584,-35.738 v1(36.5,-35.738)
T4PWM2: Q2.1 R9.1 U1.43 | length 42.8
  Top Layer w0.254: Q2.1 11.166,-12.7 R9.1 11.46,-14.838 15.113,-18.491 15.113,-19.837 21.311,-26.035 21.311,-28.27 23.952,-30.912 v1(24.714,-30.912) ; v1@36.707,-34.624 U1.43
  Bottom Layer w0.254: v1(24.714,-30.912) 32.766,-30.912 v1(36.474,-34.62)
T4PWM3: Q3.1 R10.1 U1.45 | length 54.5
  Top Layer w0.254: v1(36.774,-33.624) U1.45 ; v1(38.405,-31.064) 38.405,-29.007 v1(38.862,-28.55) ; v1(73.609,-13.868) 74.93,-12.548 R10.1 75.138,-12.442 Q3.1
  Bottom Layer w0.254: v1(36.774,-33.624) 36.774,-32.695 v1(38.405,-31.064) ; v1@38.938,-28.55 47.701,-28.55 51.968,-24.282 57.192,-24.282 60.367,-21.107 63.729,-21.107 70.968,-13.868 v1(73.609,-13.868)
T4PWM4: Q4.1 R11.1 U1.46 | length 67.3
  Top Layer w0.254: U1.46 40.185,-33.124 43.358,-36.297 48.565,-36.297 51.156,-38.887 v1(51.156,-43.764) ; v1@54.051,-44.374 54.534,-44.856 v1(56.693,-44.856) ; v1@74.524,-72.949 76.094,-74.519 R11.1 76.363,-74.625 Q4.1 Q4.1@78.571,-77.102
  Bottom Layer w0.254: v1(51.156,-43.764) 53.416,-43.764 v1(54.026,-44.374) ; v1@56.744,-44.933 56.744,-54.14 68.751,-66.148 68.751,-67.1 v1(74.371,-72.72)
TX: T3.3 U1.30 | length 41.5
  Top Layer w0.254: v1@31.547,-48.768 33.02,-50.241 v1(32.868,-50.241) ; v1(33.122,-41.453) 34.192,-40.382 U1.30 ; v1(53.492,-50.317) 53.797,-50.317 55.499,-52.019 T3.3@60.731,-52.019
  Bottom Layer w0.254: v1(31.496,-48.514) 31.496,-43.078 v1(33.122,-41.453) ; v1(32.868,-50.241) 32.944,-50.317 v1(53.492,-50.317)
TX2: T4.3 U1.12 w1.21 | length 52.1
  Top Layer w0.254: U1.12 27.291,-30.824 26.848,-31.267 26.848,-44.831 27.838,-45.822 27.838,-50.495 29.312,-51.968 v1(34.366,-51.968) ; v1(34.9,-64.465) 35.77,-65.335 w1.21
  Bottom Layer w0.254: T4.3 31.999,-64.465 v1(34.9,-64.465) 34.9,-52.68 34.188,-51.968 v1(34.366,-51.968)
VCC_3-3: A2.5 C7.2 C8.2 C9.2 C17.1 L3.1 pad.5@54.889,-30.251 R1.2 R2.2 R3.2 R14.1 R15.1 T1.1 T4.1 w1.1 w1.8 | length 141.5
  Top Layer w0.254: R14.1 27.104,-20.297 29.185,-22.377 31.877,-22.377 33.503,-24.003 37.264,-24.003 L3.1 41.173,-25.248 43.231,-27.305 C9.2 43.307,-28.242 C8.2 C7.2 50.555,-31.579 C17.1 52.114,-31.579 v1(53.848,-29.845) ; T1.1 26.494,-52.527 37.948,-52.527 38.756,-53.335 50.449,-53.335 ; v1(53.315,-41.351) 53.315,-41.557 R1.2 ; R15.1 53.063,-67.335 w1.1 50.825,-67.335 v1(49.733,-66.243) 49.733,-54.051 50.449,-53.335 ; R3.2@57.836,-42.446 R1.2 ; v1(60.833,-26.746) 60.833,-24.56 A2.5 ; 50.449,-53.335 w1.8 52.426,-52.833 R1.2
  Bottom Layer w0.254: T4.1 33.025,-66.243 v1(49.733,-66.243) ; v1(53.315,-41.351) 53.315,-30.378 v1(53.848,-29.845) 57.734,-29.845 v1(60.833,-26.746)
VCC_3-3-B: A1.5 C4.1 C19.2 C20.2 HMC.2 HMC.13 MPU1.8 MPU1.13 pad.5@49.784,-43.002 R17.1 R18.1 | length 72.6
  Top Layer w0.254: C4.1 27.634,-65.711 30.805,-62.54 A1.5 ; v1(29.464,-49.403) 29.464,-46.614 29.261,-46.411 29.748,-45.923 30.025,-45.923 HMC.2 31.746,-45.8 32.398,-45.148 HMC.13 ; C20.2 42.432,-48.793 43.917,-48.793 44.157,-48.553 MPU1.8@44.157,-47.981 ; v1(41.25,-48.565) 42.125,-48.565 ; R18.1 46.027,-39.649 R17.1 46.104,-39.726 v1(48.031,-39.726) ; MPU1.13@46.957,-46.951 47.644,-46.951 48.074,-46.521 C19.2 v1(49.809,-45.06)
  Bottom Layer w0.254: v1(29.261,-63.805) 29.464,-63.602 v1(29.464,-49.403) ; 29.87,-49.2 40.615,-49.2 v1(41.25,-48.565) 42.062,-48.565 43.713,-46.914 v1(47.955,-46.914) ; v1(48.031,-39.726) 49.809,-41.504 v1(49.809,-45.06)
VCC_5: A2.1 A2.3 A5.2 C14.2 C15.2 C18.1 D6.2 pad.5@67.005,-21.869 | length 17.6
  Top Layer w0.254: A2.1 62.708,-24.252 62.078,-23.622 62.078,-22.885 62.611,-22.352 A2.3 66.497,-22.352 v1(67.97,-20.879) 68.661,-21.569 C18.1 ; D6.2 v1(72.228,-15.681)
  Bottom Layer w0.254: pad.5@67.005,-21.869 67.005,-21.844 v1(67.97,-20.879) A5.2@69.105,-19.744 ; A5.2@72.228,-16.773 v1(72.228,-15.681)
  other v1: 64.084,-24.155 62.332,-24.079
VCC_P: R4.2 T3.1 | length 7.2
  Top Layer w0.254: R4.2 59.648,-58.31 59.563,-58.225 59.563,-54.559 T3.1@60.782,-53.34
VDDA: C10.2 L3.2 U1.9 | length 11.5
  Top Layer w0.254: 33.192,-31.795 U1.9 33.192,-25.448 C10.2 32.916,-24.945 33.426,-24.435 35.255,-24.435 36.068,-25.248 L3.2
VSSA: C10.1 L2.2 U1.8 | length 9.3
  Top Layer w0.254: L2.2 30.991,-23.546 v1(32.004,-23.546) ; U1.8@33.684,-30.353 33.684,-26.107 34.496,-25.296 C10.1
  Bottom Layer w0.254: v1(32.004,-23.546) 32.36,-23.546 v1(33.96,-25.146)
pads on no net: HMC.3 HMC.4 HMC.5 HMC.6 HMC.7 HMC.15 MPU1.2 MPU1.3 MPU1.4 MPU1.5 MPU1.6 MPU1.7 MPU1.12 MPU1.14 MPU1.15 MPU1.16 MPU1.17 MPU1.19 MPU1.21 MPU1.22 MPU1.25 S1.0 T3.4 T3.6 T3.7 T3.8 T3.9 U1.1 U1.2 U1.3 U1.4 U1.10 U1.14 U1.16 U1.17 U1.18 U1.19 U1.24 U1.25 U1.26 U1.27 U1.28 U1.29 U1.32 U1.36 U1.38 U1.39 U1.40 U1.48 w1.2 w1.4 w1.5 w1.6 w1.7 w1.9 w1.10 w1.11 w1.12 w1.13 w1.14 w1.17 w1.19 w1.20 Y1.2 Y1.4
copper on no net:
  other v2: 44.307,-46.295 45.507,-46.295 44.307,-45.095 45.507,-45.095
  other v3: 63.703,-44.526 25.654,-44.501 44.501,-26.238

## Polygon pours and split planes (outlines as drawn)
GND on Top Layer "B Layer-No Net" (solid, remove dead copper, pour order 4): -13.538,8.534 107.188,8.534 109.372,10.719 106.528,7.874 106.528,-99.365 69.342,-99.365 51.943,-81.966 53.238,-80.67 53.238,-51.079 36.805,-51.079 36.652,-51.232 36.449,-51.435 36.449,-102.387 -7.595,-102.387 -9.652,-100.33
GND on Bottom Layer "B Layer-No Net" (solid, remove dead copper, pour order 6): -20.904,13.132 -17.069,9.296 107.467,9.296 107.467,-100.584 114.478,-107.594 112.243,-105.359 -28.854,-105.359
no net on Internal Plane 1 (split plane): 21.835,-57.21 21.825,-57.23 21.835,-57.21
no net on Internal Plane 1 (split plane): -2.672,-85.79 -2.659,-85.783
no net on Internal Plane 1 (split plane): 709 vertices, not listed, extent -4.104,-93.032 93.078,4.151
no net on Internal Plane 2 (split plane): 21.835,-57.21 21.825,-57.23 21.835,-57.21
no net on Internal Plane 2 (split plane): -2.672,-85.79 -2.659,-85.783
no net on Internal Plane 2 (split plane): 709 vertices, not listed, extent -4.104,-93.032 93.078,4.151

## Keep-outs
Keep-Out Layer:
  lines w0.254: -3.32,-3.106 cw(c-44.459,-63.671) 21.47,-31.828 cw(c-4.302,-44.462) 21.47,-57.095 ; -3.292,-3.064 cw(c0.016,-0.012) 3.323,3.041 ; -2.892,-85.476 ccw(c0.016,-88.912) 3.323,-91.964 ; -2.89,-85.478 ccw(c-44.434,-25.189) 21.494,-57.032 ; 3.309,-91.955 cw(c63.675,-133.386) 31.692,-67.525 ; 3.34,3.053 ccw(c63.738,44.438) 31.895,-21.49 ; 31.742,-67.576 31.742,-68.466 56.774,-68.466 56.774,-67.412 ; 31.832,-21.466 ccw(c44.466,4.306) 57.099,-21.466 ccw(c25.256,44.463) 85.727,3.185 ; 56.905,-67.369 cw(c25.193,-133.362) 85.06,-91.213 ; 67.437,-31.891 cw(c133.366,-63.734) 91.985,-3.333 ; 67.461,-31.828 ccw(c93.234,-44.462) 67.461,-57.095 ccw(c133.39,-25.252) 90.923,-84.893 ; 85.056,-91.227 ccw(c88.916,-88.912) 90.928,-84.886 ; 85.703,3.201 cw(c88.916,-0.012) 91.997,-3.35

## Silkscreen, mask and mechanical layers (free items; w line width, h text height)
Top Overlay:
  lines w0.3: 0.022,-83.846 cw(c0.022,-88.916) 5.091,-88.787 ; 0.224,-5.127 ccw(c-0.003,0.009) 5.138,0.009 ; 83.899,0.06 ccw(c88.922,0.009) 89.142,-5.009 ; 83.926,-89.087 cw(c88.922,-88.916) 89.091,-83.92
  lines w0.5: 0.276,-83.871 2.868,-83.73 ; 0.452,-5.153 2.468,-5.288 ; 86.001,-83.811 88.863,-83.945 ; 86.763,-5.401 88.914,-5.06
  text "V/CK/G/DO" at 27.28,-51.46 h0.7 r250
  text "G/R/T/V" at 28.778,-64.77 h0.7
Bottom Overlay:
  text "V5" at 66.751,-23.673 h1
  text "V3-3" at 55.956,-30.353 h1
  text "GND" at 63.271,-31.852 h1 r270
  text "PW" at 59.487,-32.715 h1 r90
  text "+" at 64.821,-37.516 h1
  text "3.7OUT" at 46.228,-38.811 h1
  text "-" at 64.338,-40.132 h1
  text "V3-3-B" at 50.876,-42.901 h1
  text "lissettecarlr - V0.2" at 52.807,-52.375 h1
  text "Drimp-Quadcopter" at 52.807,-56.617 h1
Mechanical 1:
  lines w0.05: 31.572,-68.58 31.623,-68.631
  lines w0.254: -3.32,-3.106 cw(c-44.459,-63.671) 21.47,-31.828 cw(c-4.302,-44.462) 21.47,-57.095 ; -3.292,-3.064 cw(c0.016,-0.012) 3.323,3.041 ; -2.892,-85.476 ccw(c0.016,-88.912) 3.323,-91.964 ; -2.891,-85.478 ccw(c-44.434,-25.189) 21.494,-57.032 ; 3.309,-91.955 cw(c63.675,-133.386) 31.54,-67.599 ; 3.34,3.054 ccw(c63.738,44.438) 31.895,-21.49 ; 31.572,-68.58 31.572,-67.666 ; 31.623,-68.631 56.896,-68.631 56.896,-67.48 ; 31.832,-21.466 ccw(c44.466,4.306) 57.099,-21.466 ccw(c25.256,44.463) 85.726,3.185 ; 56.974,-67.403 cw(c25.193,-133.362) 85.06,-91.213 ; 67.437,-31.891 cw(c133.366,-63.734) 91.985,-3.333 ; 67.461,-57.095 cw(c93.234,-44.462) 67.461,-31.828 ; 67.461,-57.095 ccw(c133.39,-25.252) 90.923,-84.894 ; 85.056,-91.227 ccw(c88.916,-88.912) 90.928,-84.886 ; 85.703,3.201 cw(c88.916,-0.012) 91.997,-3.35

## Text inside footprints (layer, text, board x,y; h text height)
HMC: Top Overlay "H" at 31.293,-46.558 h1
L4: Mechanical 5 "C5.8 H4.5 W5.2 L5.8" at 53.097,-26.396 h0.3 r300
w1: Mechanical 13 "CUTOUT POLYGON" at 52.172,-74.701 h0.25 r180; Mechanical 13 "ANTENNA AREA" at 52.172,-75.209 h0.25 r180